# EAGLE board rectifier (EAGLE 6.5.0)
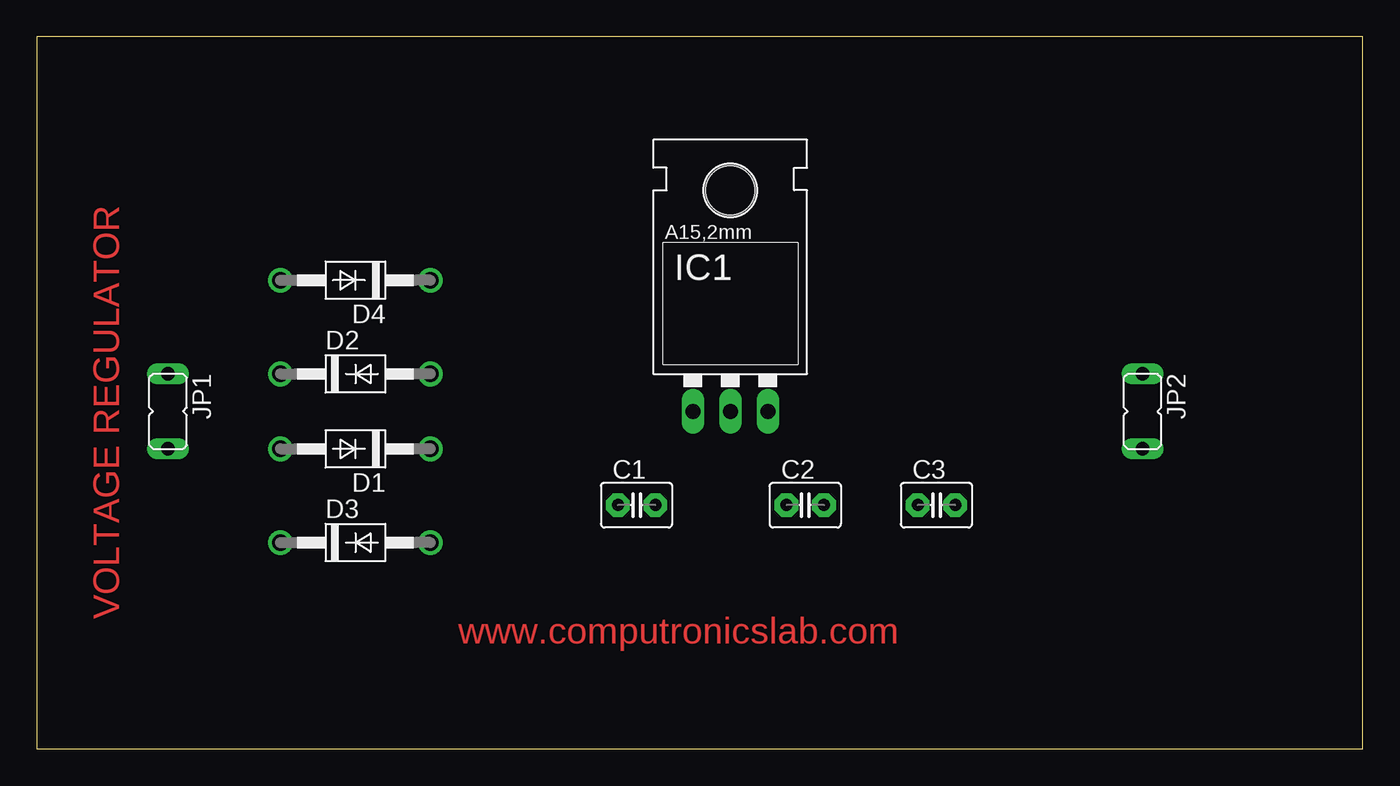
[diagram p0: board, top side]
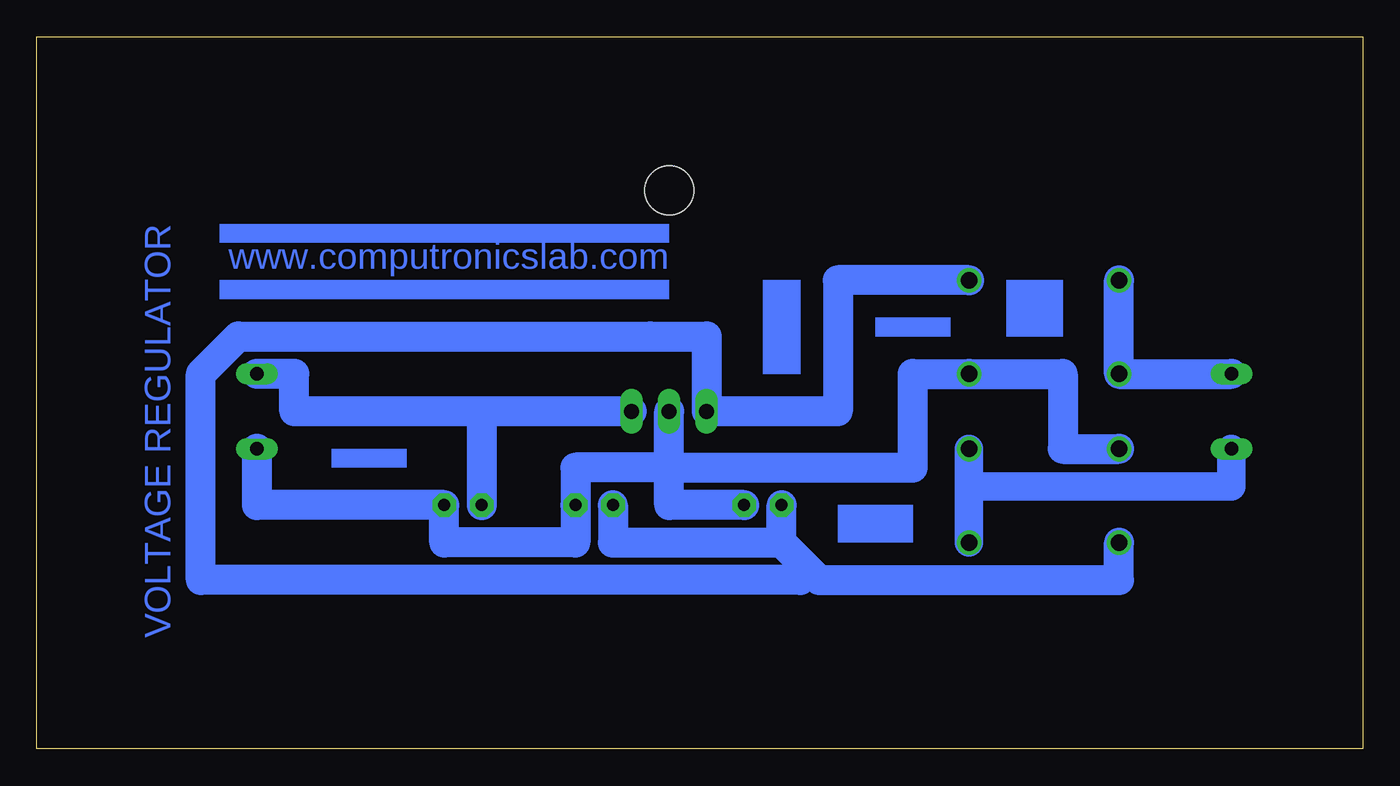
[diagram p1: board, bottom side, seen from below]

Size 89.84 x 48.25 mm. Coordinates in mm from the lower left corner, seen from the top.
Outline: 0,0 89.84,0 89.84,48.25 0,48.25 0,0
Copper layers (1*16): Top 0.035mm / dielectric 1.5mm / Bottom 0.035mm
Design rules "default *": minimum track width 80mil, minimum drill 24mil, track to track 8mil, track to pad 8mil, pad to pad 8mil, via to via 8mil, smd to smd 8mil, copper to edge 40mil, drill to drill 8mil, minimum pad ring 10mil, minimum via ring 8mil, stop-mask expansion 4mil, vias tented up to drill 0mil, thermal gap 10mil

## Footprints (pad centres in the part's own frame; a part is rotated, then mirrored left to right if it is on the bottom)
C2.5-3 = drill 0.813 pad 1.6 octagon: 1 -1.27,0; 2 1.27,0
DO41-10 = drill 1.118: A 5.08,0; C -5.08,0
78XXL = drill 1.016 long: GND 0,-3.81; IN -2.54,-3.81; OUT 2.54,-3.81 | hole 3.302: 0,11.176
JP1 = drill 0.914 long: 1 0,-2.54; 2 0,2.54

## Placement (x,y rotation side)
C1  47uf  [C2.5-3]  40.64,16.51 0 top
C2  0.1uf  [C2.5-3]  52.07,16.51 0 top
C3  0.1uf  [C2.5-3]  60.96,16.51 0 top
D1  1N4007  [DO41-10]  21.59,20.32 180 top
D2  1N4007  [DO41-10]  21.59,25.4 0 top
D3  1N4007  [DO41-10]  21.59,13.97 0 top
D4  1N4007  [DO41-10]  21.59,31.75 180 top
IC1  7805  [78XXL]  46.99,26.67 0 top
JP1  transformer  [JP1]  8.89,22.86 180 top
JP2  output  [JP1]  74.93,22.86 180 top

## Library data of the parts
C1-C3 = capacitor-wima
D1-D4 = diode
IC1 = v-reg
JP1 JP2 = jumper

## Nets
N$1: C1.2 C2.2 C3.2 D1.A D2.A IC1.GND JP2.2
N$2: C1.1 C2.1 D3.C D4.C IC1.IN
N$3: D2.C D4.A JP1.1
N$4: D1.C D3.A JP1.2
N$5: C3.1 IC1.OUT JP2.1

## Tracks (layer width: path | path; a pad name or v marks a point on that pad's centre or on a via)
N$1
  Bottom 2.032: JP2.2 74.93,16.51 C3.2 62.23,13.97 53.34,13.97 C2.2 53.34,19.05 46.99,19.05 | D1.A 20.32,20.32 20.32,25.4 D2.A 30.48,25.4 30.48,19.05 46.99,19.05 | 46.99,19.05 46.99,16.51 C1.2 | 46.99,19.05 IC1.GND
N$2
  Bottom 2.032: D4.C 35.56,31.75 35.56,22.86 IC1.IN 44.45,24.13 44.45,27.94 48.26,27.94 76.2,27.94 78.74,25.4 78.74,11.43 38.1,11.43 37.47,12.06 | 39.37,13.97 C1.1 | 39.37,13.97 48.26,13.97 50.8,13.97 C2.1 | D3.C 16.51,11.43 19.05,11.43 36.83,11.43 37.47,12.06 | 39.37,13.97 37.47,12.06
N$3
  Bottom 2.032: JP1.1 D2.C D4.A
N$4
  Bottom 0.406: 26.67,17.78 D1.C 26.67,16.51
  Bottom 1.93: JP1.2 8.89,17.78 26.67,17.78 | D1.C D3.A
N$5
  Bottom 2.032: JP2.1 72.39,25.4 72.39,22.86 59.69,22.86 | IC1.OUT 59.69,22.86 | 59.69,22.86 C3.1
(copper drawn outside any net)
  shapes: Bottom area x7

## Text on the board
Top: VOLTAGE REGULATOR | www.computronicslab.com
Bottom: VOLTAGE REGULATOR | www.computronicslab.com